# Altium PCB PCB1.PcbDoc (part 3 of 6)
Units mil, origin at the board's own origin, x right, y up, seen from the top; angles counter-clockwise.
Board outline 1280 x 1960 mil, 2 copper layers (Top Layer, Bottom Layer); 44 components, 63 nets, 315 pads, 89 vias.
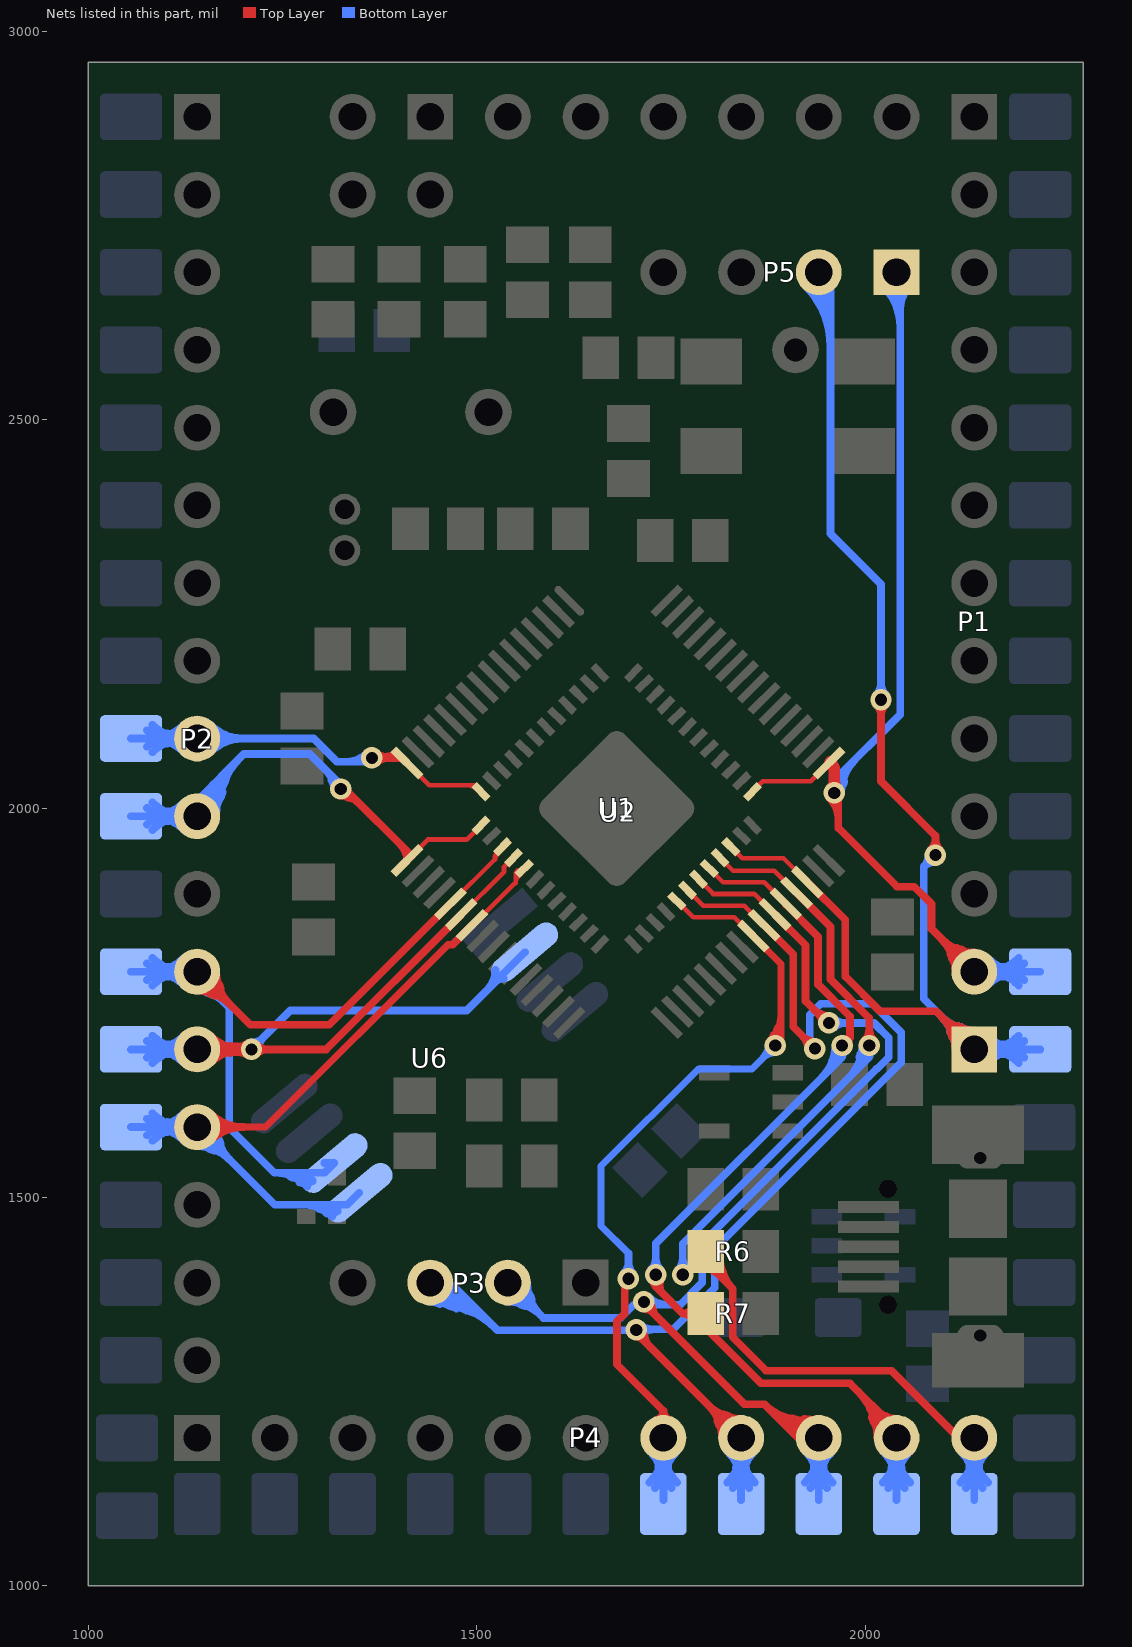
[diagram p3: the nets of this part, all layers, seen from the top]

## Via types
v1: diameter 27.56, hole 15.75, Top Layer to Bottom Layer, tented both sides, 85 vias
v2: diameter 23.62, hole 13.78, Top Layer to Bottom Layer, tented both sides, 4 vias

## Nets (pads, with @x,y where several pads share a name; then routed paths per layer and width w, separated by ;. In a path a pad name is that pad's centre, name@x,y a point inside that pad or via, vN(x,y) a via of type N, cw(c..) or ccw(c..) an arc to the next point about the centre after c; other vN are vias at no path point) (continued)
PA2: P2.9 pad.1@1055,2090 U1.12 U2.16 | length 1956.8
  Top Layer w6: U2.16@1410.25,2058.45 1438.69,2030 1496.89,2030 U1.12@1505.31,2021.58 ; 1492.86,2028.97 ccw(c1495.97,2034.36) U1.12@1498.85,2028.85 ; 1488.21,2030 cw(c1488.21,2015.61) 1498.39,2025.79 ccw(c1488.21,2015.61) 1488.21,2030
  Top Layer w10: v1(1365,2065) 1403.69,2065 U2.16@1410.25,2058.45 ; v1@1371.44,2070.96 ccw(c1381.62,2080.37) 1385.2,2066.99 ; v1@1371.44,2070.96 ccw(c1381.62,2080.37) 1385.2,2066.99 ; v1@1371.44,2070.96 ccw(c1381.62,2080.37) 1385.2,2066.99 ; 1386.2,2065 ccw(c1386.2,2043.8) 1371.21,2058.79 cw(c1386.2,2043.8) 1386.2,2065 ; 1386.2,2065 cw(c1386.2,2086.2) 1371.21,2071.21 ccw(c1386.2,2086.2) 1386.2,2065 ; v1@1377.78,2065 ccw(c1377.78,2090.91) 1396.1,2072.59 cw(c1377.78,2090.91) v1@1377.78,2065 ; U2.16@1401.93,2065 ccw(c1401.93,2066.77) 1403.17,2065.52 cw(c1401.93,2066.77) U2.16@1401.93,2065
  Bottom Layer w10: pad.1@1055,2090 P2.9@1140,2090 1290,2090 1320,2060 v1@1370,2060 ; P2.9@1116.78,2082.1 ccw(c1095.78,2074.96) 1101.52,2096.39 ccw(c1105.72,2112.07) P2.9@1119.38,2103.28 ; P2.9@1116.78,2097.9 cw(c1095.78,2105.04) 1101.52,2083.61 cw(c1105.72,2067.93) P2.9@1119.38,2076.72 ; pad.1@1080.79,2090 ccw(c1080.79,2149.21) 1122.66,2107.34 cw(c1080.79,2149.21) pad.1@1080.79,2090 ; pad.1@1080.79,2090 cw(c1080.79,2030.79) 1122.66,2072.66 ccw(c1080.79,2030.79) pad.1@1080.79,2090 ; pad.1@1086.36,2077.01 cw(c1099.56,2068.97) 1103.56,2083.9 ; pad.1@1086.36,2077.01 cw(c1099.56,2068.97) 1103.56,2083.9 ; pad.1@1086.36,2077.01 cw(c1099.56,2068.97) 1103.56,2083.9 ; pad.1@1086.36,2102.99 ccw(c1099.56,2111.03) 1103.56,2096.1 ; pad.1@1086.36,2102.99 ccw(c1099.56,2111.03) 1103.56,2096.1 ; pad.1@1086.36,2102.99 ccw(c1099.56,2111.03) 1103.56,2096.1 ; pad.1@1088.73,2082.12 cw(c1109.12,2075.35) 1103.56,2096.1 ; pad.1@1088.73,2082.12 cw(c1109.12,2075.35) 1103.56,2096.1 ; pad.1@1088.73,2082.12 cw(c1109.12,2075.35) 1103.56,2096.1 ; pad.1@1088.73,2097.88 ccw(c1109.12,2104.65) 1103.56,2083.9 ; pad.1@1088.73,2097.88 ccw(c1109.12,2104.65) 1103.56,2083.9 ; pad.1@1088.73,2097.88 ccw(c1109.12,2104.65) 1103.56,2083.9 ; 1101.21,2090 ccw(c1101.21,2053.79) 1075.61,2079.39 cw(c1101.21,2053.79) 1101.21,2090 ; 1101.21,2090 cw(c1101.21,2126.21) 1075.61,2100.61 ccw(c1101.21,2126.21) 1101.21,2090 ; 1104.93,2090 ccw(c1104.93,2125.07) 1129.73,2100.27 cw(c1104.93,2125.07) 1104.93,2090 ; 1104.93,2090 cw(c1104.93,2054.93) 1129.73,2079.73 ccw(c1104.93,2054.93) 1104.93,2090 ; P2.9@1125.36,2090 ccw(c1125.36,2029.64) 1082.68,2072.32 cw(c1125.36,2029.64) P2.9@1125.36,2090 ; P2.9@1125.36,2090 cw(c1125.36,2150.36) 1082.68,2107.68 ccw(c1125.36,2150.36) P2.9@1125.36,2090 ; 1175.07,2090 ccw(c1175.07,2054.93) 1150.27,2079.73 cw(c1175.07,2054.93) 1175.07,2090 ; 1175.07,2090 cw(c1175.07,2125.07) 1150.27,2100.27 ccw(c1175.07,2125.07) 1175.07,2090 ; 1199.21,2090 ccw(c1199.21,2030.79) 1157.34,2072.66 cw(c1199.21,2030.79) 1199.21,2090 ; 1199.21,2090 cw(c1199.21,2149.21) 1157.34,2107.34 ccw(c1199.21,2149.21) 1199.21,2090 ; 1331.73,2060 ccw(c1331.73,2098.27) 1358.79,2071.21 cw(c1331.73,2098.27) 1331.73,2060
PA3: P2.10 pad.1@1055,1990 U1.13 U2.17 | length 2241.7
  Top Layer w6: U2.17@1410.25,1933.17 1437.08,1960 1486.89,1960 U1.13@1505.31,1978.42
  Top Layer w10: v1@1323.86,2024.55 ccw(c1341.63,2031.52) 1336.69,2013.09 ; v1(1325,2025) 1330,2025 U2.17@1416.04,1938.96 ; v1@1325,2016.22 cw(c1325,1982.95) 1348.52,2006.48 ccw(c1325,1982.95) v1@1325,2016.22 ; 1402.05,1952.95 cw(c1382.28,1933.17) U2.17@1410.25,1933.17 ccw(c1382.28,1933.17) 1402.05,1952.95
  Bottom Layer w10: pad.1@1055,1990 P2.10@1140,1990 1140,2010 1200,2070 1285,2070 1330,2025 v1(1325,2025) ; P2.10@1116.78,1982.1 ccw(c1095.78,1974.96) 1101.52,1996.39 ccw(c1105.72,2012.07) P2.10@1119.38,2003.28 ; P2.10@1116.78,1997.9 cw(c1095.78,2005.04) 1101.52,1983.61 cw(c1105.72,1967.93) P2.10@1119.38,1976.72 ; P2.10@1138.1,1994.11 ccw(c1107.02,2061.26) 1178.49,2042.11 ; P2.10@1138.59,1994.3 ccw(c1127.26,2028.9) 1162.43,2019.48 ; P2.10@1142.3,1985.03 ccw(c1118.71,2036.01) 1172.96,2021.47 ; 1313.09,2036.69 ccw(c1331.52,2041.63) v1@1324.55,2023.86 ; pad.1@1080.79,1990 ccw(c1080.79,2049.21) 1122.66,2007.34 cw(c1080.79,2049.21) pad.1@1080.79,1990 ; pad.1@1080.79,1990 cw(c1080.79,1930.79) 1122.66,1972.66 ccw(c1080.79,1930.79) pad.1@1080.79,1990 ; pad.1@1086.36,1977.01 cw(c1099.56,1968.97) 1103.56,1983.9 ; pad.1@1086.36,1977.01 cw(c1099.56,1968.97) 1103.56,1983.9 ; pad.1@1086.36,1977.01 cw(c1099.56,1968.97) 1103.56,1983.9 ; pad.1@1086.36,2002.99 ccw(c1099.56,2011.03) 1103.56,1996.1 ; pad.1@1086.36,2002.99 ccw(c1099.56,2011.03) 1103.56,1996.1 ; pad.1@1086.36,2002.99 ccw(c1099.56,2011.03) 1103.56,1996.1 ; pad.1@1088.73,1982.12 cw(c1109.12,1975.35) 1103.56,1996.1 ; pad.1@1088.73,1982.12 cw(c1109.12,1975.35) 1103.56,1996.1 ; pad.1@1088.73,1982.12 cw(c1109.12,1975.35) 1103.56,1996.1 ; pad.1@1088.73,1997.88 ccw(c1109.12,2004.65) 1103.56,1983.9 ; pad.1@1088.73,1997.88 ccw(c1109.12,2004.65) 1103.56,1983.9 ; pad.1@1088.73,1997.88 ccw(c1109.12,2004.65) 1103.56,1983.9 ; 1101.21,1990 ccw(c1101.21,1953.79) 1075.61,1979.39 cw(c1101.21,1953.79) 1101.21,1990 ; 1101.21,1990 cw(c1101.21,2026.21) 1075.61,2000.61 ccw(c1101.21,2026.21) 1101.21,1990 ; 1104.93,1990 ccw(c1104.93,2025.07) 1129.73,2000.27 cw(c1104.93,2025.07) 1104.93,1990 ; 1104.93,1990 cw(c1104.93,1954.93) 1129.73,1979.73 ccw(c1104.93,1954.93) 1104.93,1990 ; P2.10@1125.36,1990 ccw(c1125.36,1929.64) 1082.68,1972.32 cw(c1125.36,1929.64) P2.10@1125.36,1990 ; P2.10@1125.36,1990 cw(c1125.36,2050.36) 1082.68,2007.68 ccw(c1125.36,2050.36) P2.10@1125.36,1990 ; P2.10@1144.53,1990 cw(c1203.74,1990) 1161.87,2031.87 ccw(c1203.74,1990) P2.10@1144.53,1990 ; P2.10@1154.53,1990 cw(c1237.88,1990) 1178.94,2048.94 ccw(c1237.88,1990) P2.10@1154.53,1990 ; P2.10@1164.53,1990 cw(c1272.03,1990) 1196.01,2066.01 ccw(c1272.03,1990) P2.10@1164.53,1990 ; 1306.48,2048.52 cw(c1282.95,2025) 1316.22,2025 ccw(c1282.95,2025) 1306.48,2048.52
PA5: P2.12 pad.1@1055,1790 U1.15 U2.21 U6.6 | length 2889.3
  Top Layer w6: U2.21@1465.92,1877.49 1523.43,1935 1523.43,1938.43 ; 1524.81,1939.4 ccw(c1521.39,1942.64) U1.15@1525.79,1944.33 ; U1.15@1533.15,1950.59 1533.15,1948.15 1523.43,1938.43 ; 1523.43,1938.43 ccw(c1517.91,1943.95) 1525.67,1944.81 cw(c1517.91,1943.95) 1523.43,1938.43 ; 1523.43,1934.17 cw(c1534.23,1934.17) 1528.59,1943.38 ccw(c1534.23,1934.17) 1523.43,1934.17 ; 1523.43,1937.23 cw(c1529.54,1937.23) 1528.05,1943.15 ccw(c1529.54,1937.23) 1523.43,1937.23
  Top Layer w10: P2.12@1134.64,1788.9 ccw(c1172.3,1796.61) 1162.35,1759.48 ; P2.12@1140,1790 1208.43,1721.57 1310,1721.57 U2.21@1465.92,1877.49 ; P2.12@1141.1,1795.36 cw(c1133.39,1757.7) 1170.52,1767.65 ; 1164.8,1765.2 ccw(c1140,1740.4) 1140,1775.47 cw(c1140,1740.4) 1164.8,1765.2 ; 1164.8,1765.2 cw(c1189.6,1790) 1154.53,1790 ccw(c1189.6,1790) 1164.8,1765.2 ; 1181.87,1748.13 ccw(c1140,1706.26) 1140,1765.47 cw(c1140,1706.26) 1181.87,1748.13 ; 1181.87,1748.13 cw(c1223.74,1790) 1164.53,1790 ccw(c1223.74,1790) 1181.87,1748.13
  Bottom Layer w10: pad.1@1055,1790 P2.12@1140,1790 1140,1785 1181.33,1743.67 1181.33,1589.2 1239.25,1531.28 ; P2.12@1116.78,1782.1 ccw(c1095.78,1774.96) 1101.52,1796.39 ccw(c1105.72,1812.07) P2.12@1119.38,1803.28 ; P2.12@1116.78,1797.9 cw(c1095.78,1805.04) 1101.52,1783.61 cw(c1105.72,1767.93) P2.12@1119.38,1776.72 ; P2.12@1134.57,1789.31 ccw(c1169.07,1793.68) 1160.07,1760.1 ; P2.12@1142.23,1795 cw(c1122.33,1750.5) 1170.13,1760.03 ; 1260.14,1526.18 ccw(c1269.36,1541.76) U6.6@1281.9,1528.7 ; 1271.46,1519.48 ccw(c1278.82,1531.91) U6.6@1288.83,1521.49 ; U6.6@1303.73,1543.73 U6.6@1316.49,1543.73 1304.04,1531.28 1239.25,1531.28 ; pad.1@1080.79,1790 ccw(c1080.79,1849.21) 1122.66,1807.34 cw(c1080.79,1849.21) pad.1@1080.79,1790 ; pad.1@1080.79,1790 cw(c1080.79,1730.79) 1122.66,1772.66 ccw(c1080.79,1730.79) pad.1@1080.79,1790 ; pad.1@1086.36,1777.01 cw(c1099.56,1768.97) 1103.56,1783.9 ; pad.1@1086.36,1777.01 cw(c1099.56,1768.97) 1103.56,1783.9 ; pad.1@1086.36,1777.01 cw(c1099.56,1768.97) 1103.56,1783.9 ; pad.1@1086.36,1802.99 ccw(c1099.56,1811.03) 1103.56,1796.1 ; pad.1@1086.36,1802.99 ccw(c1099.56,1811.03) 1103.56,1796.1 ; pad.1@1086.36,1802.99 ccw(c1099.56,1811.03) 1103.56,1796.1 ; pad.1@1088.73,1782.12 cw(c1109.12,1775.35) 1103.56,1796.1 ; pad.1@1088.73,1782.12 cw(c1109.12,1775.35) 1103.56,1796.1 ; pad.1@1088.73,1782.12 cw(c1109.12,1775.35) 1103.56,1796.1 ; pad.1@1088.73,1797.88 ccw(c1109.12,1804.65) 1103.56,1783.9 ; pad.1@1088.73,1797.88 ccw(c1109.12,1804.65) 1103.56,1783.9 ; pad.1@1088.73,1797.88 ccw(c1109.12,1804.65) 1103.56,1783.9 ; 1101.21,1790 ccw(c1101.21,1753.79) 1075.61,1779.39 cw(c1101.21,1753.79) 1101.21,1790 ; 1101.21,1790 cw(c1101.21,1826.21) 1075.61,1800.61 ccw(c1101.21,1826.21) 1101.21,1790 ; 1104.93,1790 ccw(c1104.93,1825.07) 1129.73,1800.27 cw(c1104.93,1825.07) 1104.93,1790 ; 1104.93,1790 cw(c1104.93,1754.93) 1129.73,1779.73 ccw(c1104.93,1754.93) 1104.93,1790 ; P2.12@1125.36,1790 ccw(c1125.36,1729.64) 1082.68,1772.32 cw(c1125.36,1729.64) P2.12@1125.36,1790 ; P2.12@1125.36,1790 cw(c1125.36,1850.36) 1082.68,1807.68 ccw(c1125.36,1850.36) P2.12@1125.36,1790 ; 1239.25,1531.28 cw(c1239.25,1471.94) 1281.67,1513.44 ccw(c1239.25,1471.94) 1239.25,1531.28 ; P2.12@1140,1765.47 cw(c1140,1718.33) 1173.34,1751.66 ccw(c1140,1718.33) P2.12@1140,1765.47 ; P2.12@1154.5,1789.06 ccw(c1192.97,1786.55) 1165.71,1759.29 cw(c1192.97,1786.55) P2.12@1154.5,1789.06 ; P2.12@1164.48,1788.41 ccw(c1222.29,1784.65) 1181.32,1743.68 cw(c1222.29,1784.65) P2.12@1164.48,1788.41 ; 1263.03,1531.28 cw(c1263.03,1495.2) 1288.81,1520.43 ccw(c1263.03,1495.2) 1263.03,1531.28
PA6: P2.13 pad.1@1055,1690 U1.16 U2.22 U6.2 | length 2718.2
  Top Layer w6: U2.22@1479.84,1863.57 1535,1918.73 1535,1925 1546.67,1936.67 U1.16@1547.07,1936.67 ; 1537.53,1927.53 cw(c1541.5,1923.56) 1541.5,1929.18 ccw(c1541.5,1923.56) 1537.53,1927.53
  Top Layer w10: P2.13@1140,1690 v1(1210,1690) 1306.27,1690 U2.22@1479.84,1863.57 ; 1175.07,1690 ccw(c1175.07,1654.93) 1150.27,1679.73 cw(c1175.07,1654.93) 1175.07,1690 ; 1175.07,1690 cw(c1175.07,1725.07) 1150.27,1700.27 ccw(c1175.07,1725.07) 1175.07,1690 ; 1182.29,1685.47 cw(c1190.25,1655.79) v1@1205.61,1682.4 ; 1182.29,1685.47 cw(c1190.25,1655.79) v1@1205.61,1682.4 ; 1182.29,1685.47 cw(c1190.25,1655.79) v1@1205.61,1682.4 ; 1182.29,1694.53 ccw(c1190.25,1724.21) v1@1205.61,1697.6 ; 1182.29,1694.53 ccw(c1190.25,1724.21) v1@1205.61,1697.6 ; 1182.29,1694.53 ccw(c1190.25,1724.21) v1@1205.61,1697.6 ; 1188.8,1690 ccw(c1188.8,1711.2) 1203.79,1696.21 cw(c1188.8,1711.2) 1188.8,1690 ; 1188.8,1690 cw(c1188.8,1668.8) 1203.79,1683.79 ccw(c1188.8,1668.8) 1188.8,1690 ; 1195.31,1688.95 ccw(c1192.29,1700.22) v1@1202.4,1694.39 ; 1195.31,1688.95 ccw(c1192.29,1700.22) v1@1202.4,1694.39 ; 1195.31,1688.95 ccw(c1192.29,1700.22) v1@1202.4,1694.39 ; 1195.31,1691.05 cw(c1192.29,1679.78) v1@1202.4,1685.61 ; 1195.31,1691.05 cw(c1192.29,1679.78) v1@1202.4,1685.61 ; 1195.31,1691.05 cw(c1192.29,1679.78) v1@1202.4,1685.61 ; v1@1199.21,1690 ccw(c1199.21,1630.79) 1157.34,1672.66 cw(c1199.21,1630.79) v1@1199.21,1690 ; v1@1199.21,1690 cw(c1199.21,1749.21) 1157.34,1707.34 ccw(c1199.21,1749.21) v1@1199.21,1690 ; 1231.2,1690 ccw(c1231.2,1668.8) 1216.21,1683.79 cw(c1231.2,1668.8) 1231.2,1690 ; 1231.2,1690 cw(c1231.2,1711.2) 1216.21,1696.21 ccw(c1231.2,1711.2) 1231.2,1690
  Bottom Layer w10: pad.1@1055,1690 P2.13@1140,1690 ; P2.13@1116.78,1682.1 ccw(c1095.78,1674.96) 1101.52,1696.39 ccw(c1105.72,1712.07) P2.13@1119.38,1703.28 ; P2.13@1116.78,1697.9 cw(c1095.78,1705.04) 1101.52,1683.61 cw(c1105.72,1667.93) P2.13@1119.38,1676.72 ; v1(1210,1690) 1260,1740 1486.97,1740 U6.2@1561.82,1814.85 ; pad.1@1080.79,1690 ccw(c1080.79,1749.21) 1122.66,1707.34 cw(c1080.79,1749.21) pad.1@1080.79,1690 ; pad.1@1080.79,1690 cw(c1080.79,1630.79) 1122.66,1672.66 ccw(c1080.79,1630.79) pad.1@1080.79,1690 ; pad.1@1086.36,1677.01 cw(c1099.56,1668.97) 1103.56,1683.9 ; pad.1@1086.36,1677.01 cw(c1099.56,1668.97) 1103.56,1683.9 ; pad.1@1086.36,1677.01 cw(c1099.56,1668.97) 1103.56,1683.9 ; pad.1@1086.36,1702.99 ccw(c1099.56,1711.03) 1103.56,1696.1 ; pad.1@1086.36,1702.99 ccw(c1099.56,1711.03) 1103.56,1696.1 ; pad.1@1086.36,1702.99 ccw(c1099.56,1711.03) 1103.56,1696.1 ; pad.1@1088.73,1682.12 cw(c1109.12,1675.35) 1103.56,1696.1 ; pad.1@1088.73,1682.12 cw(c1109.12,1675.35) 1103.56,1696.1 ; pad.1@1088.73,1682.12 cw(c1109.12,1675.35) 1103.56,1696.1 ; pad.1@1088.73,1697.88 ccw(c1109.12,1704.65) 1103.56,1683.9 ; pad.1@1088.73,1697.88 ccw(c1109.12,1704.65) 1103.56,1683.9 ; pad.1@1088.73,1697.88 ccw(c1109.12,1704.65) 1103.56,1683.9 ; 1101.21,1690 ccw(c1101.21,1653.79) 1075.61,1679.39 cw(c1101.21,1653.79) 1101.21,1690 ; 1101.21,1690 cw(c1101.21,1726.21) 1075.61,1700.61 ccw(c1101.21,1726.21) 1101.21,1690 ; 1104.93,1690 ccw(c1104.93,1725.07) 1129.73,1700.27 cw(c1104.93,1725.07) 1104.93,1690 ; 1104.93,1690 cw(c1104.93,1654.93) 1129.73,1679.73 ccw(c1104.93,1654.93) 1104.93,1690 ; P2.13@1125.36,1690 ccw(c1125.36,1629.64) 1082.68,1672.32 cw(c1125.36,1629.64) P2.13@1125.36,1690 ; P2.13@1125.36,1690 cw(c1125.36,1750.36) 1082.68,1707.68 ccw(c1125.36,1750.36) P2.13@1125.36,1690 ; 1224.99,1704.99 ccw(c1239.98,1690) 1218.78,1690 cw(c1239.98,1690) 1224.99,1704.99 ; 1224.99,1704.99 cw(c1210,1719.98) 1210,1698.78 ccw(c1210,1719.98) 1224.99,1704.99 ; 1513.24,1766.27 ccw(c1487.44,1792.08) 1523.93,1792.08 cw(c1487.44,1792.08) 1513.24,1766.27 ; 1523.78,1776.82 cw(c1534.67,1765.92) 1534.67,1781.33 ccw(c1534.67,1765.92) 1523.78,1776.82
PA7: P2.14 pad.1@1055,1590 U1.17 U2.23 U6.5 | length 2748
  Top Layer w6: 1463.19,1825 1463.54,1825 ; U2.23@1493.76,1849.65 1494.65,1849.65 1550,1905 1550,1911.76 U1.17@1560.99,1922.75 ; 1551.69,1910.4 ccw(c1546.21,1915.45) U1.17@1553.53,1916.82 ; U2.23@1507.9,1865.8 ccw(c1507.9,1872.78) 1512.84,1867.84 cw(c1507.9,1872.78) U2.23@1507.9,1865.8 ; 1550,1903.85 cw(c1563.85,1903.85) 1556.45,1915.56 ccw(c1563.85,1903.85) 1550,1903.85 ; 1550,1909.52 cw(c1555.75,1909.52) 1555.5,1915.26 ccw(c1555.75,1909.52) 1550,1909.52 ; 1550,1914.74 cw(c1556.96,1914.74) 1553.24,1920.63 ccw(c1556.96,1914.74) 1550,1914.74
  Top Layer w9: 1200,1590 1228.19,1590 1463.19,1825
  Top Layer w10: P2.14@1140,1590 1200,1590 ; 1463.54,1824.65 1468.75,1824.65 U2.23@1493.76,1849.65 ; 1175.07,1590 ccw(c1175.07,1554.93) 1150.27,1579.73 cw(c1175.07,1554.93) 1175.07,1590 ; 1175.07,1590 cw(c1175.07,1625.07) 1150.27,1600.27 ccw(c1175.07,1625.07) 1175.07,1590 ; 1199.21,1590 ccw(c1199.21,1530.79) 1157.34,1572.66 cw(c1199.21,1530.79) 1199.21,1590 ; 1199.21,1590 cw(c1199.21,1649.21) 1157.34,1607.34 ccw(c1199.21,1649.21) 1199.21,1590
  Bottom Layer w10: pad.1@1055,1590 P2.14@1140,1590 1240,1490 1333.2,1490 U6.5@1348.63,1505.43 ; P2.14@1116.78,1582.1 ccw(c1095.78,1574.96) 1101.52,1596.39 ccw(c1105.72,1612.07) P2.14@1119.38,1603.28 ; P2.14@1116.78,1597.9 cw(c1095.78,1605.04) 1101.52,1583.61 cw(c1105.72,1567.93) P2.14@1119.38,1576.72 ; P2.14@1134.64,1588.9 ccw(c1172.3,1596.61) 1162.35,1559.48 ; P2.14@1141.1,1595.36 cw(c1133.39,1557.7) 1170.52,1567.65 ; 1296.2,1485.26 ccw(c1302.48,1496.14) U6.5@1312.72,1488.87 ; 1305.71,1479.77 ccw(c1311.48,1489.76) U6.5@1320.88,1483.08 ; pad.1@1080.79,1590 ccw(c1080.79,1649.21) 1122.66,1607.34 cw(c1080.79,1649.21) pad.1@1080.79,1590 ; pad.1@1080.79,1590 cw(c1080.79,1530.79) 1122.66,1572.66 ccw(c1080.79,1530.79) pad.1@1080.79,1590 ; pad.1@1086.36,1577.01 cw(c1099.56,1568.97) 1103.56,1583.9 ; pad.1@1086.36,1577.01 cw(c1099.56,1568.97) 1103.56,1583.9 ; pad.1@1086.36,1577.01 cw(c1099.56,1568.97) 1103.56,1583.9 ; pad.1@1086.36,1602.99 ccw(c1099.56,1611.03) 1103.56,1596.1 ; pad.1@1086.36,1602.99 ccw(c1099.56,1611.03) 1103.56,1596.1 ; pad.1@1086.36,1602.99 ccw(c1099.56,1611.03) 1103.56,1596.1 ; pad.1@1088.73,1582.12 cw(c1109.12,1575.35) 1103.56,1596.1 ; pad.1@1088.73,1582.12 cw(c1109.12,1575.35) 1103.56,1596.1 ; pad.1@1088.73,1582.12 cw(c1109.12,1575.35) 1103.56,1596.1 ; pad.1@1088.73,1597.88 ccw(c1109.12,1604.65) 1103.56,1583.9 ; pad.1@1088.73,1597.88 ccw(c1109.12,1604.65) 1103.56,1583.9 ; pad.1@1088.73,1597.88 ccw(c1109.12,1604.65) 1103.56,1583.9 ; 1101.21,1590 ccw(c1101.21,1553.79) 1075.61,1579.39 cw(c1101.21,1553.79) 1101.21,1590 ; 1101.21,1590 cw(c1101.21,1626.21) 1075.61,1600.61 ccw(c1101.21,1626.21) 1101.21,1590 ; 1104.93,1590 ccw(c1104.93,1625.07) 1129.73,1600.27 cw(c1104.93,1625.07) 1104.93,1590 ; 1104.93,1590 cw(c1104.93,1554.93) 1129.73,1579.73 ccw(c1104.93,1554.93) 1104.93,1590 ; P2.14@1125.36,1590 ccw(c1125.36,1529.64) 1082.68,1572.32 cw(c1125.36,1529.64) P2.14@1125.36,1590 ; P2.14@1125.36,1590 cw(c1125.36,1650.36) 1082.68,1607.68 ccw(c1125.36,1650.36) P2.14@1125.36,1590 ; 1164.8,1565.2 ccw(c1140,1540.4) 1140,1575.47 cw(c1140,1540.4) 1164.8,1565.2 ; 1164.8,1565.2 cw(c1189.6,1590) 1154.53,1590 ccw(c1189.6,1590) 1164.8,1565.2 ; 1181.87,1548.13 ccw(c1140,1506.26) 1140,1565.47 cw(c1140,1506.26) 1181.87,1548.13 ; 1181.87,1548.13 cw(c1223.74,1590) 1164.53,1590 ccw(c1223.74,1590) 1181.87,1548.13 ; 1277.8,1490 cw(c1277.8,1438.96) 1313.89,1475.05 ccw(c1277.8,1438.96) 1277.8,1490 ; 1301.94,1490 cw(c1301.94,1463.11) 1320.96,1482.12 ccw(c1301.94,1463.11) 1301.94,1490
PA8: P4.7 pad.1@1740,1105 U1.29 U2.41 | length 2314.5
  Top Layer w6: U1.29@1757.25,1880.99 1778.24,1860 1831.4,1860 U2.41@1855.67,1835.73
  Top Layer w9: U2.41@1855.67,1835.73 1891.5,1799.9 1891.5,1702.5 v1(1884,1695) ; 1881.83,1709.17 ccw(c1891.45,1703.61) v1@1884.18,1695.21 ; 1887.28,1718.6 ccw(c1898.71,1712) v1@1890.07,1702.02 ; v1@1877.44,1701.56 ccw(c1843.49,1735.51) 1891.5,1735.51 cw(c1843.49,1735.51) v1@1877.44,1701.56 ; v1@1883.8,1695.2 ccw(c1865.22,1713.78) 1891.5,1713.78 cw(c1865.22,1713.78) v1@1883.8,1695.2
  Top Layer w10: v1(1695,1395) 1690.22,1390.22 1690.22,1350 1680.22,1340 1680.22,1284.78 1740,1225 ; P4.7@1740,1190 1740,1225 ; 1740,1225 ccw(c1752.71,1225) 1748.37,1213.06 cw(c1752.71,1225) 1740,1225 ; 1740,1225 cw(c1727.29,1225) 1731.63,1213.06 ccw(c1727.29,1225) 1740,1225
  Bottom Layer w9: 1695,1427.67 1660,1462.67 1660,1540 1785,1665 1854,1665 v1(1884,1695) ; 1868.16,1679.16 ccw(c1852.32,1695) 1874.72,1695 cw(c1852.32,1695) 1868.16,1679.16 ; 1868.16,1679.16 cw(c1884,1663.32) 1884,1685.72 ccw(c1884,1663.32) 1868.16,1679.16
  Bottom Layer w10: v1@1695,1400 1695,1427.67 ; P4.7@1726.72,1169.38 cw(c1717.93,1155.72) 1733.61,1151.52 cw(c1755.04,1145.78) P4.7@1747.9,1166.78 ; P4.7@1732.1,1166.78 cw(c1724.96,1145.78) 1746.39,1151.52 cw(c1762.07,1155.72) P4.7@1753.28,1169.38 ; pad.1@1740,1110 P4.7@1740,1190 ; 1695,1416.2 ccw(c1716.2,1416.2) 1701.21,1401.21 cw(c1716.2,1416.2) 1695,1416.2 ; 1695,1416.2 cw(c1673.8,1416.2) 1688.79,1401.21 ccw(c1673.8,1416.2) 1695,1416.2 ; pad.1@1727.01,1136.36 ccw(c1718.97,1149.56) 1733.9,1153.56 ; pad.1@1727.01,1136.36 ccw(c1718.97,1149.56) 1733.9,1153.56 ; pad.1@1727.01,1136.36 ccw(c1718.97,1149.56) 1733.9,1153.56 ; pad.1@1732.12,1138.73 ccw(c1725.35,1159.12) 1746.1,1153.56 ; pad.1@1732.12,1138.73 ccw(c1725.35,1159.12) 1746.1,1153.56 ; pad.1@1732.12,1138.73 ccw(c1725.35,1159.12) 1746.1,1153.56 ; 1733.9,1153.56 ccw(c1754.65,1159.12) pad.1@1747.88,1138.73 ; 1733.9,1153.56 ccw(c1754.65,1159.12) pad.1@1747.88,1138.73 ; 1733.9,1153.56 ccw(c1754.65,1159.12) pad.1@1747.88,1138.73 ; pad.1@1740,1130.79 ccw(c1680.79,1130.79) 1722.66,1172.66 cw(c1680.79,1130.79) pad.1@1740,1130.79 ; pad.1@1740,1130.79 cw(c1799.21,1130.79) 1757.34,1172.66 ccw(c1799.21,1130.79) pad.1@1740,1130.79 ; 1740,1151.21 ccw(c1776.21,1151.21) 1750.61,1125.61 cw(c1776.21,1151.21) 1740,1151.21 ; 1740,1151.21 cw(c1703.79,1151.21) 1729.39,1125.61 ccw(c1703.79,1151.21) 1740,1151.21 ; 1740,1154.93 ccw(c1704.93,1154.93) 1729.73,1179.73 cw(c1704.93,1154.93) 1740,1154.93 ; 1740,1154.93 cw(c1775.07,1154.93) 1750.27,1179.73 ccw(c1775.07,1154.93) 1740,1154.93 ; P4.7@1740,1175.36 ccw(c1800.36,1175.36) 1757.68,1132.68 cw(c1800.36,1175.36) P4.7@1740,1175.36 ; P4.7@1740,1175.36 cw(c1679.64,1175.36) 1722.32,1132.68 ccw(c1679.64,1175.36) P4.7@1740,1175.36 ; 1746.1,1153.56 ccw(c1761.03,1149.56) pad.1@1752.99,1136.36 ; 1746.1,1153.56 ccw(c1761.03,1149.56) pad.1@1752.99,1136.36 ; 1746.1,1153.56 ccw(c1761.03,1149.56) pad.1@1752.99,1136.36
PA9: P3.3 P4.8 pad.1@1840,1105 U1.30 U2.42 | length 3929.4
  Top Layer w6: U1.30@1771.17,1894.91 1791.08,1875 1844.24,1875 U2.42@1869.59,1849.65
  Top Layer w10: v1@1705,1330 v1(1705,1329) 1705,1325 P4.8@1840,1190 ; v1@1705.41,1330.15 cw(c1699.33,1313.14) 1716.78,1317.82 ; 1809.48,1212.35 ccw(c1846.61,1222.3) P4.8@1838.9,1184.64 ; 1817.65,1220.52 cw(c1807.7,1183.39) P4.8@1845.36,1191.1 ; U2.42@1869.59,1849.65 1907,1812.24 1907,1719 v1(1935,1691) ; 1923.77,1700.15 ccw(c1937.64,1703.87) v1@1934.76,1689.8 ; 1925.85,1702.23 cw(c1922.13,1688.36) v1@1936.2,1691.24 ; 1798.13,1231.87 ccw(c1840,1273.74) 1840,1214.53 cw(c1840,1273.74) 1798.13,1231.87 ; 1798.13,1231.87 cw(c1756.26,1190) 1815.47,1190 ccw(c1756.26,1190) 1798.13,1231.87 ; 1815.2,1214.8 ccw(c1840,1239.6) 1840,1204.53 cw(c1840,1239.6) 1815.2,1214.8 ; 1815.2,1214.8 cw(c1790.4,1190) 1825.47,1190 ccw(c1790.4,1190) 1815.2,1214.8 ; 1920.01,1705.99 ccw(c1935,1720.98) 1935,1699.78 cw(c1935,1720.98) 1920.01,1705.99 ; 1920.01,1705.99 cw(c1905.02,1691) 1926.22,1691 ccw(c1905.02,1691) 1920.01,1705.99 ; v1@1705,1320.22 cw(c1705,1308.68) 1713.16,1316.84 ccw(c1705,1308.68) v1@1705,1320.22 ; v1@1713.78,1329 ccw(c1744.63,1329) 1722.82,1307.18 cw(c1744.63,1329) v1@1713.78,1329
  Bottom Layer w10: P3.3@1426.3,1382.81 ccw(c1462.29,1401.69) 1452.13,1362.34 ; P3.3@1435.15,1387.46 ccw(c1489.22,1415.82) 1473.96,1356.71 ; P3.3@1444.01,1392.1 ccw(c1516.14,1429.95) 1495.79,1351.08 ; P3.3@1444.2,1391.7 ccw(c1483.3,1407.56) 1472.38,1366.8 ; P3.3@1453.46,1395.46 ccw(c1506.63,1417.02) 1491.78,1361.6 ; P3.3@1454.29,1392.6 ccw(c1472.49,1395.92) 1467.7,1378.05 ; 1470,1385 1526.53,1328.47 v1@1703.47,1328.47 ; v1@1705,1330 1752.67,1330 1806,1383.33 1806,1433.27 2046,1673.27 2046,1711.67 2008.89,1748.78 1942.74,1748.78 1928.22,1734.26 1928.22,1697.78 v1(1935,1691) ; P4.8@1826.72,1169.38 cw(c1817.93,1155.72) 1833.61,1151.52 cw(c1855.04,1145.78) P4.8@1847.9,1166.78 ; P4.8@1832.1,1166.78 cw(c1824.96,1145.78) 1846.39,1151.52 cw(c1862.07,1155.72) P4.8@1853.28,1169.38 ; P4.8@1835,1195 P4.8@1840,1190 pad.1@1840,1110 ; pad.1@1827.01,1136.36 ccw(c1818.97,1149.56) 1833.9,1153.56 ; pad.1@1827.01,1136.36 ccw(c1818.97,1149.56) 1833.9,1153.56 ; pad.1@1827.01,1136.36 ccw(c1818.97,1149.56) 1833.9,1153.56 ; pad.1@1832.12,1138.73 ccw(c1825.35,1159.12) 1846.1,1153.56 ; pad.1@1832.12,1138.73 ccw(c1825.35,1159.12) 1846.1,1153.56 ; pad.1@1832.12,1138.73 ccw(c1825.35,1159.12) 1846.1,1153.56 ; 1833.9,1153.56 ccw(c1854.65,1159.12) pad.1@1847.88,1138.73 ; 1833.9,1153.56 ccw(c1854.65,1159.12) pad.1@1847.88,1138.73 ; 1833.9,1153.56 ccw(c1854.65,1159.12) pad.1@1847.88,1138.73 ; pad.1@1840,1130.79 ccw(c1780.79,1130.79) 1822.66,1172.66 cw(c1780.79,1130.79) pad.1@1840,1130.79 ; pad.1@1840,1130.79 cw(c1899.21,1130.79) 1857.34,1172.66 ccw(c1899.21,1130.79) pad.1@1840,1130.79 ; 1840,1151.21 ccw(c1876.21,1151.21) 1850.61,1125.61 cw(c1876.21,1151.21) 1840,1151.21 ; 1840,1151.21 cw(c1803.79,1151.21) 1829.39,1125.61 ccw(c1803.79,1151.21) 1840,1151.21 ; 1840,1154.93 ccw(c1804.93,1154.93) 1829.73,1179.73 cw(c1804.93,1154.93) 1840,1154.93 ; 1840,1154.93 cw(c1875.07,1154.93) 1850.27,1179.73 ccw(c1875.07,1154.93) 1840,1154.93 ; P4.8@1840,1175.36 ccw(c1900.36,1175.36) 1857.68,1132.68 cw(c1900.36,1175.36) P4.8@1840,1175.36 ; P4.8@1840,1175.36 cw(c1779.64,1175.36) 1822.32,1132.68 ccw(c1779.64,1175.36) P4.8@1840,1175.36 ; 1846.1,1153.56 ccw(c1861.03,1149.56) pad.1@1852.99,1136.36 ; 1846.1,1153.56 ccw(c1861.03,1149.56) pad.1@1852.99,1136.36 ; 1846.1,1153.56 ccw(c1861.03,1149.56) pad.1@1852.99,1136.36 ; P3.3@1440,1365.47 cw(c1440,1245.9) 1524.55,1330.45 ccw(c1440,1245.9) P3.3@1440,1365.47 ; P3.3@1440,1375.47 cw(c1440,1280.04) 1507.48,1347.52 ccw(c1440,1280.04) P3.3@1440,1375.47 ; P3.3@1440,1385.47 cw(c1440,1314.19) 1490.41,1364.59 ccw(c1440,1314.19) P3.3@1440,1385.47 ; P3.3@1440,1395.47 cw(c1440,1348.33) 1473.34,1381.66 ccw(c1440,1348.33) P3.3@1440,1395.47 ; v1@1711.21,1322.79 cw(c1728.61,1305.39) 1728.61,1330 ccw(c1728.61,1305.39) v1@1711.21,1322.79 ; v1@1711.21,1335.21 ccw(c1723.78,1347.78) 1723.78,1330 cw(c1723.78,1347.78) v1@1711.21,1335.21
PA10: P3.2 P4.9 pad.1@1940,1105 U1.31 U2.43 | length 3535.2
  Top Layer w6: U1.31@1785.09,1908.83 1803.92,1890 1857.08,1890 U2.43@1883.51,1863.57
  Top Layer w10: v1(1715,1365) 1715,1362.83 1844.39,1233.44 1870,1233.44 ; v1@1715.34,1366.17 cw(c1710.79,1350.53) 1726.53,1354.75 ; U2.43@1883.51,1863.57 1923,1824.08 1923,1752 v1@1945,1730 ; 1897.44,1216.16 cw(c1893.58,1148.6) P4.9@1944.08,1193.64 ; 1921.54,1214.79 cw(c1919.06,1171.32) P4.9@1951.55,1200.3 ; P4.9@1940,1190 1913.44,1190 1870,1233.44 ; 1942.83,1735.5 cw(c1938.66,1719.92) v1@1954.17,1724.33 ; 1870,1233.44 ccw(c1920.5,1283.93) 1935.01,1214.02 cw(c1920.5,1283.93) 1870,1233.44 ; v1@1715,1356.22 cw(c1715,1340.26) 1726.28,1351.55 ccw(c1715,1340.26) v1@1715,1356.22 ; v1@1723.78,1365 ccw(c1750.21,1365) 1731.52,1346.31 cw(c1750.21,1365) v1@1723.78,1365 ; 1883.1,1220.34 ccw(c1925,1262.24) 1937.05,1204.22 cw(c1925,1262.24) 1883.1,1220.34 ; 1896.2,1207.25 ccw(c1929.5,1240.55) 1939.08,1194.43 cw(c1929.5,1240.55) 1896.2,1207.25 ; 1909.29,1194.15 ccw(c1934.01,1218.86) 1941.11,1184.64 cw(c1934.01,1218.86) 1909.29,1194.15 ; 1934.6,1740.4 ccw(c1953,1758.8) 1953,1732.78 cw(c1953,1758.8) 1934.6,1740.4 ; 1939.43,1735.57 cw(c1927.85,1724) 1944.22,1724 ccw(c1927.85,1724) 1939.43,1735.57
  Bottom Layer w10: P3.2@1534.64,1388.9 ccw(c1572.3,1396.61) 1562.35,1359.48 ; P3.2@1540,1390 1585.53,1344.47 1685,1344.47 v1@1702.03,1361.5 ; P3.2@1541.1,1395.36 cw(c1533.39,1357.7) 1570.52,1367.65 ; v1@1715,1361.5 1761.54,1361.5 1790,1389.96 1790,1440.63 2014.37,1665 2015.11,1665 2030,1679.89 2030,1705.04 2011.04,1724 v1(1953,1724) ; P4.9@1926.72,1169.38 cw(c1917.93,1155.72) 1933.61,1151.52 cw(c1955.04,1145.78) P4.9@1947.9,1166.78 ; P4.9@1932.1,1166.78 cw(c1924.96,1145.78) 1946.39,1151.52 cw(c1962.07,1155.72) P4.9@1953.28,1169.38 ; pad.1@1940,1110 P4.9@1940,1190 ; 1564.8,1365.2 ccw(c1540,1340.4) 1540,1375.47 cw(c1540,1340.4) 1564.8,1365.2 ; 1564.8,1365.2 cw(c1589.6,1390) 1554.53,1390 ccw(c1589.6,1390) 1564.8,1365.2 ; 1581.87,1348.13 ccw(c1540,1306.26) 1540,1365.47 cw(c1540,1306.26) 1581.87,1348.13 ; 1581.87,1348.13 cw(c1623.74,1390) 1564.53,1390 ccw(c1623.74,1390) 1581.87,1348.13 ; pad.1@1927.01,1136.36 ccw(c1918.97,1149.56) 1933.9,1153.56 ; pad.1@1927.01,1136.36 ccw(c1918.97,1149.56) 1933.9,1153.56 ; pad.1@1927.01,1136.36 ccw(c1918.97,1149.56) 1933.9,1153.56 ; pad.1@1932.12,1138.73 ccw(c1925.35,1159.12) 1946.1,1153.56 ; pad.1@1932.12,1138.73 ccw(c1925.35,1159.12) 1946.1,1153.56 ; pad.1@1932.12,1138.73 ccw(c1925.35,1159.12) 1946.1,1153.56 ; 1933.9,1153.56 ccw(c1954.65,1159.12) pad.1@1947.88,1138.73 ; 1933.9,1153.56 ccw(c1954.65,1159.12) pad.1@1947.88,1138.73 ; 1933.9,1153.56 ccw(c1954.65,1159.12) pad.1@1947.88,1138.73 ; pad.1@1940,1130.79 ccw(c1880.79,1130.79) 1922.66,1172.66 cw(c1880.79,1130.79) pad.1@1940,1130.79 ; pad.1@1940,1130.79 cw(c1999.21,1130.79) 1957.34,1172.66 ccw(c1999.21,1130.79) pad.1@1940,1130.79 ; 1940,1151.21 ccw(c1976.21,1151.21) 1950.61,1125.61 cw(c1976.21,1151.21) 1940,1151.21 ; 1940,1151.21 cw(c1903.79,1151.21) 1929.39,1125.61 ccw(c1903.79,1151.21) 1940,1151.21 ; 1940,1154.93 ccw(c1904.93,1154.93) 1929.73,1179.73 cw(c1904.93,1154.93) 1940,1154.93 ; 1940,1154.93 cw(c1975.07,1154.93) 1950.27,1179.73 ccw(c1975.07,1154.93) 1940,1154.93 ; P4.9@1940,1175.36 ccw(c2000.36,1175.36) 1957.68,1132.68 cw(c2000.36,1175.36) P4.9@1940,1175.36 ; P4.9@1940,1175.36 cw(c1879.64,1175.36) 1922.32,1132.68 ccw(c1879.64,1175.36) P4.9@1940,1175.36 ; 1946.1,1153.56 ccw(c1961.03,1149.56) pad.1@1952.99,1136.36 ; 1946.1,1153.56 ccw(c1961.03,1149.56) pad.1@1952.99,1136.36 ; 1946.1,1153.56 ccw(c1961.03,1149.56) pad.1@1952.99,1136.36 ; 1974.2,1724 ccw(c1974.2,1702.8) 1959.21,1717.79 cw(c1974.2,1702.8) 1974.2,1724 ; 1974.2,1724 cw(c1974.2,1745.2) 1959.21,1730.21 ccw(c1974.2,1745.2) 1974.2,1724 ; v1@1721.21,1371.21 ccw(c1744.65,1394.65) 1744.65,1361.5 cw(c1744.65,1394.65) v1@1721.21,1371.21
PA11: P4.10 pad.1@2040,1105 R7.1 U1.32 U2.44 | length 3151
  Top Layer w6: U1.32@1799.01,1922.75 1816.76,1905 1869.92,1905 U2.44@1897.43,1877.49
  Top Layer w10: v1(1730.22,1400) 1730.22,1384.82 ; 1739.78,1375.22 1765,1350 ; U2.44@1897.43,1877.49 1897.43,1876.57 1939,1835 1939,1773.57 1980,1732.57 1980,1705 ; v1(1970,1695) 1980,1705 ; 2003.31,1235.4 ccw(c2061.27,1250.93) P4.10@2041.49,1194.27 ; 2008.2,1217.14 ccw(c2053.73,1229.34) P4.10@2038.2,1184.83 ; 2019.05,1213.96 ccw(c2044.87,1220.87) P4.10@2040.71,1194.47 ; 2022.44,1219.23 cw(c2014.39,1189.2) P4.10@2045.47,1190.17 ; P4.10@2040,1190 2040,1200.5 1980,1260.5 1865.57,1260.5 1794.57,1331.5 R7.1@1794.57,1350 1765,1350 ; 1730.22,1384.82 ccw(c1721.49,1384.82) 1725.84,1392.39 cw(c1721.49,1384.82) 1730.22,1384.82 ; 1730.22,1384.82 cw(c1738.95,1384.82) 1734.6,1392.39 ccw(c1738.95,1384.82) 1730.22,1384.82 ; 1730.22,1384.82 1739.78,1375.26 ; 1739.78,1375.26 cw(c1751.12,1386.61) 1737.61,1395.26 ccw(c1751.12,1386.61) 1739.78,1375.26 ; 1765,1350 ccw(c1765,1364.16) 1777.77,1358.04 cw(c1765,1364.16) 1765,1350 ; 1765,1350 cw(c1765,1335.84) 1777.77,1341.96 ccw(c1765,1335.84) 1765,1350 ; 1980,1705 ccw(c1984.95,1700.05) 1978.32,1697.81 cw(c1984.95,1700.05) 1980,1705 ; 1980,1705 cw(c1975.05,1709.95) 1972.81,1703.32 ccw(c1975.05,1709.95) 1980,1705 ; v1@1729.19,1400.66 ccw(c1740.41,1393.47) 1730.99,1384.05 cw(c1740.41,1393.47) v1@1729.19,1400.66 ; 1990.7,1249.8 cw(c1930.91,1190) 2015.47,1190 ccw(c1930.91,1190) 1990.7,1249.8 ; 2007.78,1232.72 cw(c1965.05,1190) 2025.47,1190 ccw(c1965.05,1190) 2007.78,1232.72 ; 2016.05,1224.45 ccw(c2040,1248.39) 2040,1214.53 cw(c2040,1248.39) 2016.05,1224.45 ; 2024.85,1215.65 cw(c1999.19,1190) 2035.47,1190 ccw(c1999.19,1190) 2024.85,1215.65
  Bottom Layer w10: v1(1730.22,1400) 1730.22,1440.26 1970,1680.04 ; v1@1964.7,1688 cw(c1960.34,1682.26) 1967.31,1680.39 cw(c1976.43,1677.95) v1@1973.1,1686.78 ; v1(1970,1695) 1970,1680.04 ; P4.10@2026.72,1169.38 cw(c2017.93,1155.72) 2033.61,1151.52 cw(c2055.04,1145.78) P4.10@2047.9,1166.78 ; P4.10@2032.1,1166.78 cw(c2024.96,1145.78) 2046.39,1151.52 cw(c2062.07,1155.72) P4.10@2053.28,1169.38 ; pad.1@2040,1110 P4.10@2040,1190 ; 1730.22,1421.2 ccw(c1751.42,1421.2) 1736.43,1406.21 cw(c1751.42,1421.2) 1730.22,1421.2 ; 1730.22,1421.2 cw(c1709.02,1421.2) 1724.01,1406.21 ccw(c1709.02,1421.2) 1730.22,1421.2 ; 1970,1680.04 ccw(c1961.65,1680.04) 1965.72,1687.33 cw(c1961.65,1680.04) 1970,1680.04 ; 1970,1680.04 cw(c1978.35,1680.04) 1974.28,1687.33 ccw(c1978.35,1680.04) 1970,1680.04 ; pad.1@2027.01,1136.36 ccw(c2018.97,1149.56) 2033.9,1153.56 ; pad.1@2027.01,1136.36 ccw(c2018.97,1149.56) 2033.9,1153.56 ; pad.1@2027.01,1136.36 ccw(c2018.97,1149.56) 2033.9,1153.56 ; pad.1@2032.12,1138.73 ccw(c2025.35,1159.12) 2046.1,1153.56 ; pad.1@2032.12,1138.73 ccw(c2025.35,1159.12) 2046.1,1153.56 ; pad.1@2032.12,1138.73 ccw(c2025.35,1159.12) 2046.1,1153.56 ; 2033.9,1153.56 ccw(c2054.65,1159.12) pad.1@2047.88,1138.73 ; 2033.9,1153.56 ccw(c2054.65,1159.12) pad.1@2047.88,1138.73 ; 2033.9,1153.56 ccw(c2054.65,1159.12) pad.1@2047.88,1138.73 ; pad.1@2040,1130.79 ccw(c1980.79,1130.79) 2022.66,1172.66 cw(c1980.79,1130.79) pad.1@2040,1130.79 ; pad.1@2040,1130.79 cw(c2099.21,1130.79) 2057.34,1172.66 ccw(c2099.21,1130.79) pad.1@2040,1130.79 ; 2040,1151.21 ccw(c2076.21,1151.21) 2050.61,1125.61 cw(c2076.21,1151.21) 2040,1151.21 ; 2040,1151.21 cw(c2003.79,1151.21) 2029.39,1125.61 ccw(c2003.79,1151.21) 2040,1151.21 ; 2040,1154.93 ccw(c2004.93,1154.93) 2029.73,1179.73 cw(c2004.93,1154.93) 2040,1154.93 ; 2040,1154.93 cw(c2075.07,1154.93) 2050.27,1179.73 ccw(c2075.07,1154.93) 2040,1154.93 ; P4.10@2040,1175.36 ccw(c2100.36,1175.36) 2057.68,1132.68 cw(c2100.36,1175.36) P4.10@2040,1175.36 ; P4.10@2040,1175.36 cw(c1979.64,1175.36) 2022.32,1132.68 ccw(c1979.64,1175.36) P4.10@2040,1175.36 ; 2046.1,1153.56 ccw(c2061.03,1149.56) pad.1@2052.99,1136.36 ; 2046.1,1153.56 ccw(c2061.03,1149.56) pad.1@2052.99,1136.36 ; 2046.1,1153.56 ccw(c2061.03,1149.56) pad.1@2052.99,1136.36 ; 1944.44,1654.48 ccw(c1903.92,1695) 1961.22,1695 cw(c1903.92,1695) 1944.44,1654.48 ; 1961.51,1671.55 ccw(c1938.06,1695) 1971.22,1695 cw(c1938.06,1695) 1961.51,1671.55
PA12: P4.11 pad.1@2140,1105 R6.1 U1.33 U2.45 | length 2837.9
  Top Layer w6: U1.33@1812.93,1936.67 1829.6,1920 1882.76,1920 U2.45@1911.34,1891.41
  Top Layer w10: R6.1@1794.57,1430 1794.57,1416.74 1829.19,1382.12 ; R6.1@1795.21,1427.28 cw(c1773.34,1386.2) 1818.99,1395.22 ; U2.45@1911.34,1891.41 1955,1847.76 1955,1780.2 2005,1730.2 v1(2005,1695) ; P4.11@2145,1195 2145,1190 P4.11@2140,1190 2120,1190 2033.5,1276.5 1872.2,1276.5 1829.19,1319.51 1829.19,1382.12 ; 1829.19,1382.12 cw(c1868.21,1421.14) 1813.15,1424.82 ccw(c1868.21,1421.14) 1829.19,1382.12 ; 2005,1716.2 ccw(c2026.2,1716.2) 2011.21,1701.21 cw(c2026.2,1716.2) 2005,1716.2 ; 2005,1716.2 cw(c1983.8,1716.2) 1998.79,1701.21 ccw(c1983.8,1716.2) 2005,1716.2 ; R6.1@1794.57,1407.44 cw(c1794.57,1384.99) 1810.44,1400.87 ccw(c1794.57,1384.99) R6.1@1794.57,1407.44 ; R6.1@1803.17,1425.49 ccw(c1839,1423.09) 1813.61,1397.7 cw(c1839,1423.09) R6.1@1803.17,1425.49
  Bottom Layer w10: v1(1765,1400) 1765,1440 2005,1680 ; 1992.27,1680.27 cw(c2017.39,1673.53) v1@2004.39,1696.06 ; v1@1999.67,1688.02 cw(c1995.25,1682.23) 2002.29,1680.34 cw(c2011.52,1677.87) v1@2008.12,1686.79 ; v1(2005,1695) 2005,1680 ; P4.11@2126.72,1169.38 cw(c2117.93,1155.72) 2133.61,1151.52 cw(c2155.04,1145.78) P4.11@2147.9,1166.78 ; P4.11@2132.1,1166.78 cw(c2124.96,1145.78) 2146.39,1151.52 cw(c2162.07,1155.72) P4.11@2153.28,1169.38 ; pad.1@2140,1110 P4.11@2140,1190 ; 1765,1421.2 ccw(c1786.2,1421.2) 1771.21,1406.21 cw(c1786.2,1421.2) 1765,1421.2 ; 1765,1421.2 cw(c1743.8,1421.2) 1758.79,1406.21 ccw(c1743.8,1421.2) 1765,1421.2 ; 2005,1680 ccw(c1996.58,1680) 2000.7,1687.34 cw(c1996.58,1680) 2005,1680 ; 2005,1680 cw(c2013.42,1680) 2009.3,1687.34 ccw(c2013.42,1680) 2005,1680 ; pad.1@2127.01,1136.36 ccw(c2118.97,1149.56) 2133.9,1153.56 ; pad.1@2127.01,1136.36 ccw(c2118.97,1149.56) 2133.9,1153.56 ; pad.1@2127.01,1136.36 ccw(c2118.97,1149.56) 2133.9,1153.56 ; pad.1@2132.12,1138.73 ccw(c2125.35,1159.12) 2146.1,1153.56 ; pad.1@2132.12,1138.73 ccw(c2125.35,1159.12) 2146.1,1153.56 ; pad.1@2132.12,1138.73 ccw(c2125.35,1159.12) 2146.1,1153.56 ; 2133.9,1153.56 ccw(c2154.65,1159.12) pad.1@2147.88,1138.73 ; 2133.9,1153.56 ccw(c2154.65,1159.12) pad.1@2147.88,1138.73 ; 2133.9,1153.56 ccw(c2154.65,1159.12) pad.1@2147.88,1138.73 ; pad.1@2140,1130.79 ccw(c2080.79,1130.79) 2122.66,1172.66 cw(c2080.79,1130.79) pad.1@2140,1130.79 ; pad.1@2140,1130.79 cw(c2199.21,1130.79) 2157.34,1172.66 ccw(c2199.21,1130.79) pad.1@2140,1130.79 ; 2140,1151.21 ccw(c2176.21,1151.21) 2150.61,1125.61 cw(c2176.21,1151.21) 2140,1151.21 ; 2140,1151.21 cw(c2103.79,1151.21) 2129.39,1125.61 ccw(c2103.79,1151.21) 2140,1151.21 ; 2140,1154.93 ccw(c2104.93,1154.93) 2129.73,1179.73 cw(c2104.93,1154.93) 2140,1154.93 ; 2140,1154.93 cw(c2175.07,1154.93) 2150.27,1179.73 ccw(c2175.07,1154.93) 2140,1154.93 ; P4.11@2140,1175.36 ccw(c2200.36,1175.36) 2157.68,1132.68 cw(c2200.36,1175.36) P4.11@2140,1175.36 ; P4.11@2140,1175.36 cw(c2079.64,1175.36) 2122.32,1132.68 ccw(c2079.64,1175.36) P4.11@2140,1175.36 ; 2146.1,1153.56 ccw(c2161.03,1149.56) pad.1@2152.99,1136.36 ; 2146.1,1153.56 ccw(c2161.03,1149.56) pad.1@2152.99,1136.36 ; 2146.1,1153.56 ccw(c2161.03,1149.56) pad.1@2152.99,1136.36 ; 1979.41,1654.41 ccw(c1938.81,1695) 1996.22,1695 cw(c1938.81,1695) 1979.41,1654.41 ; 1996.48,1671.48 ccw(c1972.95,1695) 2006.22,1695 cw(c1972.95,1695) 1996.48,1671.48
PA13: P1.1 P5.2 pad.1@2225,1690 U1.34 U2.46 | length 4078.1
  Top Layer w6: U1.34@1826.85,1950.59 1841.44,1936 1894.6,1936 U2.46@1925.26,1905.33
  Top Layer w10: U2.46@1925.26,1905.33 1974,1856.6 1974,1835 1973.91,1834.91 1973.91,1783.91 2018.83,1739 2091,1739 P1.1@2140,1690 ; v1(2020,2140) 2020,2035 2090,1965 v1(2090,1940) ; 2109.48,1712.35 ccw(c2146.61,1722.3) P1.1@2138.9,1684.64 ; 2117.65,1720.52 cw(c2107.7,1683.39) P1.1@2145.36,1691.1 ; 2020,2118.8 ccw(c1998.8,2118.8) 2013.79,2133.79 cw(c1998.8,2118.8) 2020,2118.8 ; 2020,2118.8 cw(c2041.2,2118.8) 2026.21,2133.79 ccw(c2041.2,2118.8) 2020,2118.8 ; 2090,1961.2 ccw(c2111.2,1961.2) 2096.21,1946.21 cw(c2111.2,1961.2) 2090,1961.2 ; 2090,1961.2 cw(c2068.8,1961.2) 2083.79,1946.21 ccw(c2068.8,1961.2) 2090,1961.2 ; 2098.13,1731.87 ccw(c2140,1773.74) 2140,1714.53 cw(c2140,1773.74) 2098.13,1731.87 ; 2098.13,1731.87 cw(c2056.26,1690) 2115.47,1690 ccw(c2056.26,1690) 2098.13,1731.87 ; P1.1@2115.2,1714.8 ccw(c2140,1739.6) 2140,1704.53 cw(c2140,1739.6) P1.1@2115.2,1714.8 ; P1.1@2115.2,1714.8 cw(c2090.4,1690) 2125.47,1690 ccw(c2090.4,1690) P1.1@2115.2,1714.8
  Bottom Layer w10: P5.2@1940,2690 1955,2675 1955,2353.63 2020,2288.63 v1(2020,2140) ; P5.2@1942.72,2665.62 cw(c1943.73,2656.58) 1951.62,2661.13 cw(c1957.12,2664.3) P5.2@1953.6,2669.59 ; 1942.78,2657.12 cw(c1956.09,2664.8) P5.2@1947.82,2677.76 ; 1948.01,2648.06 cw(c1961.72,2655.98) P5.2@1953.2,2669.33 ; v1(2090,1940) 2075,1925 ; 2109.48,1712.35 ccw(c2146.61,1722.3) P1.1@2138.9,1684.64 ; 2117.65,1720.52 cw(c2107.7,1683.39) P1.1@2145.36,1691.1 ; P1.1@2160.62,1676.72 cw(c2174.28,1667.93) 2178.48,1683.61 cw(c2184.22,1705.04) P1.1@2163.22,1697.9 ; P1.1@2160.62,1703.28 ccw(c2174.28,1712.07) 2178.48,1696.39 ccw(c2184.22,1674.96) P1.1@2163.22,1682.1 ; pad.1@2225,1690 P1.1@2140,1690 2075,1755 2075,1925 ; 2020,2161.2 ccw(c2041.2,2161.2) 2026.21,2146.21 cw(c2041.2,2161.2) 2020,2161.2 ; 2020,2161.2 cw(c1998.8,2161.2) 2013.79,2146.21 ccw(c1998.8,2161.2) 2020,2161.2 ; 2075.01,1925.01 ccw(c2060.02,1940) 2081.22,1940 cw(c2060.02,1940) 2075.01,1925.01 ; 2075.01,1925.01 cw(c2090,1910.02) 2090,1931.22 ccw(c2090,1910.02) 2075.01,1925.01 ; 2098.13,1731.87 ccw(c2140,1773.74) 2140,1714.53 cw(c2140,1773.74) 2098.13,1731.87 ; 2098.13,1731.87 cw(c2056.26,1690) 2115.47,1690 ccw(c2056.26,1690) 2098.13,1731.87 ; P1.1@2115.2,1714.8 ccw(c2140,1739.6) 2140,1704.53 cw(c2140,1739.6) P1.1@2115.2,1714.8 ; P1.1@2115.2,1714.8 cw(c2090.4,1690) 2125.47,1690 ccw(c2090.4,1690) P1.1@2115.2,1714.8 ; P1.1@2154.64,1690 ccw(c2154.64,1750.36) 2197.32,1707.68 cw(c2154.64,1750.36) P1.1@2154.64,1690 ; P1.1@2154.64,1690 cw(c2154.64,1629.64) 2197.32,1672.32 ccw(c2154.64,1629.64) P1.1@2154.64,1690 ; 2175.07,1690 ccw(c2175.07,1654.93) 2150.27,1679.73 cw(c2175.07,1654.93) 2175.07,1690 ; 2175.07,1690 cw(c2175.07,1725.07) 2150.27,1700.27 ccw(c2175.07,1725.07) 2175.07,1690 ; 2176.44,1683.9 ccw(c2170.88,1704.65) pad.1@2191.27,1697.88 ; 2176.44,1683.9 cw(c2180.44,1668.97) pad.1@2193.64,1677.01 ; 2176.44,1683.9 ccw(c2170.88,1704.65) pad.1@2191.27,1697.88 ; 2176.44,1683.9 cw(c2180.44,1668.97) pad.1@2193.64,1677.01 ; 2176.44,1683.9 ccw(c2170.88,1704.65) pad.1@2191.27,1697.88 ; 2176.44,1683.9 cw(c2180.44,1668.97) pad.1@2193.64,1677.01 ; 2176.44,1696.1 ccw(c2180.44,1711.03) pad.1@2193.64,1702.99 ; 2176.44,1696.1 cw(c2170.88,1675.35) pad.1@2191.27,1682.12 ; 2176.44,1696.1 ccw(c2180.44,1711.03) pad.1@2193.64,1702.99 ; 2176.44,1696.1 cw(c2170.88,1675.35) pad.1@2191.27,1682.12 ; 2176.44,1696.1 ccw(c2180.44,1711.03) pad.1@2193.64,1702.99 ; 2176.44,1696.1 cw(c2170.88,1675.35) pad.1@2191.27,1682.12 ; 2178.79,1690 ccw(c2178.79,1726.21) 2204.39,1700.61 cw(c2178.79,1726.21) 2178.79,1690 ; 2178.79,1690 cw(c2178.79,1653.79) 2204.39,1679.39 ccw(c2178.79,1653.79) 2178.79,1690 ; pad.1@2199.21,1690 ccw(c2199.21,1630.79) 2157.34,1672.66 cw(c2199.21,1630.79) pad.1@2199.21,1690 ; pad.1@2199.21,1690 cw(c2199.21,1749.21) 2157.34,1707.34 ccw(c2199.21,1749.21) pad.1@2199.21,1690 ; P5.2@1922.66,2672.66 cw(c1844.57,2594.57) 1955,2594.57 ccw(c1844.57,2594.57) P5.2@1922.66,2672.66 ; P5.2@1929.73,2679.73 cw(c1868.71,2618.71) 1955,2618.71 ccw(c1868.71,2618.71) P5.2@1929.73,2679.73 ; P5.2@1936.8,2686.8 cw(c1892.86,2642.86) 1955,2642.86 ccw(c1892.86,2642.86) P5.2@1936.8,2686.8
PA14: P1.2 P5.1 pad.1@2225,1790 U1.37 U2.49 | length 3199.2
  Top Layer w6: U1.37@1854.69,2021.58 1868.11,2035 1929.66,2035 U2.49@1953.1,2058.45
  Top Layer w10: v1@1965,2015 1965,1975 2040.78,1899.22 2062.95,1899.22 2085,1877.17 2085,1845 P1.2@2140,1790 ; 2109.48,1812.35 ccw(c2146.61,1822.3) P1.2@2138.9,1784.64 ; 2117.65,1820.52 cw(c2107.7,1783.39) P1.2@2145.36,1791.1 ; 2098.13,1831.87 ccw(c2140,1873.74) 2140,1814.53 cw(c2140,1873.74) 2098.13,1831.87 ; 2098.13,1831.87 cw(c2056.26,1790) 2115.47,1790 ccw(c2056.26,1790) 2098.13,1831.87 ; 2115.2,1814.8 ccw(c2140,1839.6) 2140,1804.53 cw(c2140,1839.6) 2115.2,1814.8 ; 2115.2,1814.8 cw(c2090.4,1790) 2125.47,1790 ccw(c2090.4,1790) 2115.2,1814.8 ; v1@1953.79,2013.79 cw(c1926.73,1986.73) 1965,1986.73 ccw(c1926.73,1986.73) v1@1953.79,2013.79
  Top Layer w15: U2.49@1955.1,2058.45 1960,2051.55 v1@1960,2023.45 ; 1960,2035.16 ccw(c1975.16,2035.16) 1964.44,2024.44 cw(c1975.16,2035.16) 1960,2035.16 ; 1960,2035.16 cw(c1944.84,2035.16) 1955.56,2024.44 ccw(c1944.84,2035.16) 1960,2035.16 ; U2.49@1954.76,2060.32 cw(c1944.48,2048.69) 1960,2048.69 ccw(c1944.48,2048.69) U2.49@1954.76,2060.32
  Bottom Layer w10: v1@1956.32,2027.97 ccw(c1951.15,2039.16) 1963.06,2035.97 ccw(c1972.15,2033.54) v1@1965.86,2026.53 ; v1(1960,2020) 1960,2036.09 ; v1@1960.61,2018.94 ccw(c1947.61,2041.47) 1972.73,2034.73 ; P5.1@2040,2690 2044.78,2685.22 2044.78,2120.87 1960,2036.09 ; P1.2@2140,1790 pad.1@2225,1790 ; P1.2@2160.62,1776.72 cw(c2174.28,1767.93) 2178.48,1783.61 cw(c2184.22,1805.04) P1.2@2163.22,1797.9 ; P1.2@2160.62,1803.28 ccw(c2174.28,1812.07) 2178.48,1796.39 ccw(c2184.22,1774.96) P1.2@2163.22,1782.1 ; 1960,2036.09 ccw(c1970.35,2036.09) 1964.75,2027.38 cw(c1970.35,2036.09) 1960,2036.09 ; 1960,2036.09 cw(c1949.65,2036.09) 1955.25,2027.38 ccw(c1949.65,2036.09) 1960,2036.09 ; P1.2@2154.64,1790 ccw(c2154.64,1850.36) 2197.32,1807.68 cw(c2154.64,1850.36) P1.2@2154.64,1790 ; P1.2@2154.64,1790 cw(c2154.64,1729.64) 2197.32,1772.32 ccw(c2154.64,1729.64) P1.2@2154.64,1790 ; 2175.07,1790 ccw(c2175.07,1754.93) 2150.27,1779.73 cw(c2175.07,1754.93) 2175.07,1790 ; 2175.07,1790 cw(c2175.07,1825.07) 2150.27,1800.27 ccw(c2175.07,1825.07) 2175.07,1790 ; 2176.44,1783.9 ccw(c2170.88,1804.65) pad.1@2191.27,1797.88 ; 2176.44,1783.9 cw(c2180.44,1768.97) pad.1@2193.64,1777.01 ; 2176.44,1783.9 ccw(c2170.88,1804.65) pad.1@2191.27,1797.88 ; 2176.44,1783.9 cw(c2180.44,1768.97) pad.1@2193.64,1777.01 ; 2176.44,1783.9 ccw(c2170.88,1804.65) pad.1@2191.27,1797.88 ; 2176.44,1783.9 cw(c2180.44,1768.97) pad.1@2193.64,1777.01 ; 2176.44,1796.1 ccw(c2180.44,1811.03) pad.1@2193.64,1802.99 ; 2176.44,1796.1 cw(c2170.88,1775.35) pad.1@2191.27,1782.12 ; 2176.44,1796.1 ccw(c2180.44,1811.03) pad.1@2193.64,1802.99 ; 2176.44,1796.1 cw(c2170.88,1775.35) pad.1@2191.27,1782.12 ; 2176.44,1796.1 ccw(c2180.44,1811.03) pad.1@2193.64,1802.99 ; 2176.44,1796.1 cw(c2170.88,1775.35) pad.1@2191.27,1782.12 ; 2178.79,1790 ccw(c2178.79,1826.21) 2204.39,1800.61 cw(c2178.79,1826.21) 2178.79,1790 ; 2178.79,1790 cw(c2178.79,1753.79) 2204.39,1779.39 ccw(c2178.79,1753.79) 2178.79,1790 ; pad.1@2199.21,1790 ccw(c2199.21,1730.79) 2157.34,1772.66 cw(c2199.21,1730.79) pad.1@2199.21,1790 ; pad.1@2199.21,1790 cw(c2199.21,1849.21) 2157.34,1807.34 ccw(c2199.21,1849.21) pad.1@2199.21,1790 ; v1@1958.78,2020 cw(c1994.67,2020) 1969.29,2045.38 ccw(c1994.67,2020) v1@1958.78,2020 ; v1@1968.78,2020 cw(c2028.81,2020) 1986.36,2062.45 ccw(c2028.81,2020) v1@1968.78,2020 ; P5.1@2022.66,2672.66 cw(c1969.25,2619.25) 2044.78,2619.25 ccw(c1969.25,2619.25) P5.1@2022.66,2672.66 ; P5.1@2029.73,2679.73 cw(c1993.39,2643.39) 2044.78,2643.39 ccw(c1993.39,2643.39) P5.1@2029.73,2679.73 ; 2044.78,2642.32 cw(c2087.68,2642.32) 2057.34,2672.66 ccw(c2087.68,2642.32) 2044.78,2642.32